# EAGLE board placa_v1 (EAGLE 7.2.0)
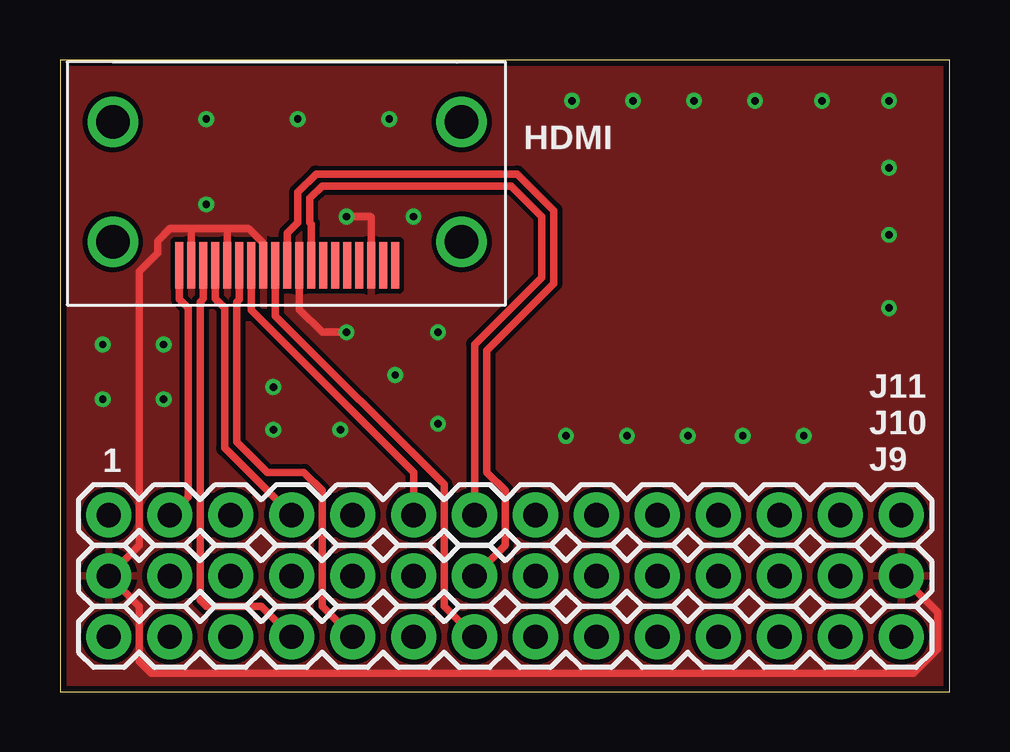
[diagram p0: board, top side]
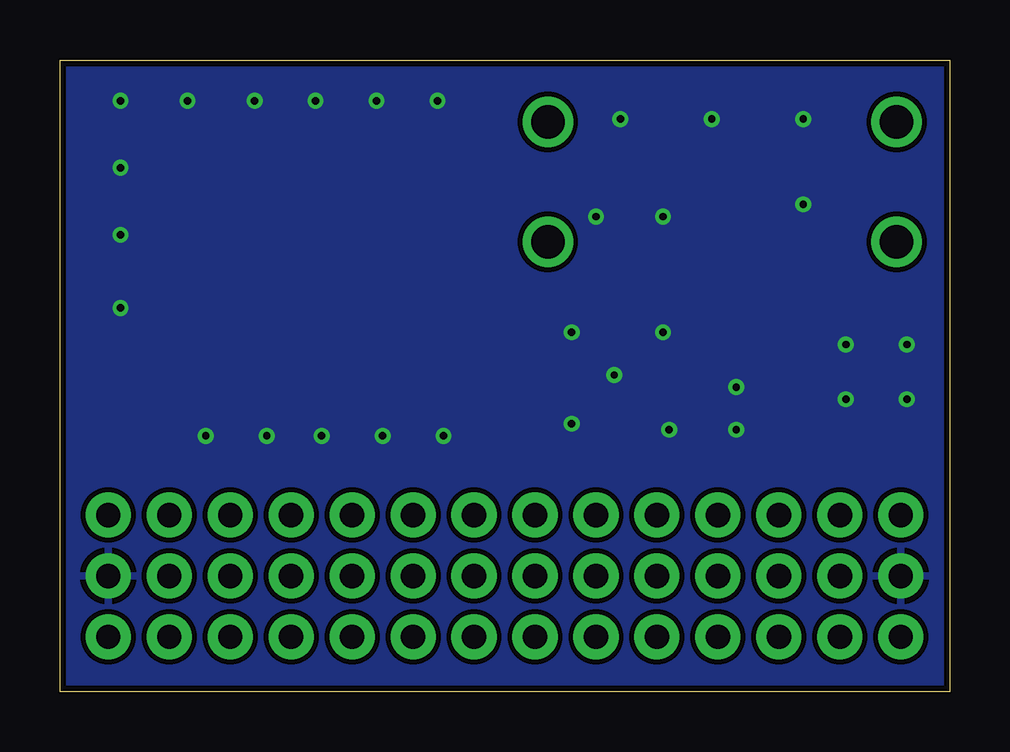
[diagram p1: board, bottom side, seen from below]

Size 37.06 x 26.34 mm. Coordinates in mm from the lower left corner, seen from the top.
Outline: 0,0 37.06,0 37.06,26.34 0,26.34 0,0
Copper layers (1*16): Top 0.035mm / dielectric 1.5mm / Bottom 0.035mm
Design rules "dirt_cheap_dirty_boards.v1": minimum track width 5mil, minimum drill 12mil, track to track 5mil, track to pad 5mil, pad to pad 5mil, via to via 5mil, smd to smd 0mil, copper to edge 10mil, drill to drill 10mil, minimum pad ring 10mil, minimum via ring 6mil, stop-mask expansion 2mil, vias tented up to drill 25mil, thermal gap 10mil
Net classes: 0 default: width 0.203 mm, clearance 0.203 mm; 1 power: width 0.406 mm, clearance 0.203 mm to class 0, clearance 0.203 mm

## Footprints (pad centres in the part's own frame; a part is rotated, then mirrored left to right if it is on the bottom)
1X14 = drill 1.016 pad 1.88: 1 0,0; 2 2.54,0; 3 5.08,0; 4 7.62,0; 5 10.16,0; 6 12.7,0; 7 15.24,0; 8 17.78,0; 9 20.32,0; 10 22.86,0; 11 25.4,0; 12 27.94,0; 13 30.48,0; 14 33.02,0
HDMI = smd 0.33 x 1.95: P$1 0,0; P$2 0.5,0; P$3 1,0; P$4 1.5,0; P$5 2,0; P$6 2.5,0; P$7 3,0; P$8 3.5,0; P$9 4,0; P$10 4.5,0; P$11 5,0; P$12 5.5,0; P$13 6,0; P$14 6.5,0; P$15 7,0; P$16 7.5,0; P$17 8,0; P$18 8.5,0; P$19 9,0 | drill 1.4: P$20 -2.765,-0.975; P$21 -2.765,-5.975; P$22 11.765,-5.975; P$23 11.765,-0.975

## Placement (x,y rotation side)
J9  M14  [1X14]  2.03,2.29 0 top
J10  M14  [1X14]  2.03,4.83 0 top
J11  M14  [1X14]  2.03,7.37 0 top
U$1  HDMI  [HDMI]  13.97,17.78 180 top

## Library data of the parts
J9-J11 = SparkFun
U$1 = 00_cody

## Nets
CLK_N: J11.7 U$1.P$8
CLK_P: J10.7 U$1.P$10
D0_N: J9.7 U$1.P$11
D0_P: J11.6 U$1.P$13
D1_N: J9.5 U$1.P$14
D1_P: J11.4 U$1.P$16
D2_N: J9.4 U$1.P$17
D2_P: J11.2 U$1.P$19
GND [power]: J10.1 J10.14 U$1.P$3 U$1.P$9 U$1.P$12 U$1.P$15 U$1.P$18

## Tracks (layer width: path | path; a pad name or v marks a point on that pad's centre or on a via)
CLK_N
  Top 0.305: U$1.P$8 10.47,19.5 10.41,19.56 10.41,20.57 10.92,21.08 18.8,21.08 20.07,19.81 20.07,17.27 17.27,14.48 J11.7
CLK_P
  Top 0.305: U$1.P$10 9.47,19.12 9.91,19.56 9.91,20.83 10.67,21.59 19.05,21.59 20.57,20.07 20.57,17.02 17.78,14.22 17.78,9.14 18.54,8.38 18.54,6.1 J10.7
D0_N
  Top 0.305: J9.7 16,3.56 16,8.64 8.97,15.67 U$1.P$11
D0_P
  Top 0.305: J11.6 14.73,9.14 7.97,15.91 U$1.P$13
D1_N
  Top 0.305: J9.5 10.92,3.56 10.92,8.38 10.16,9.14 8.64,9.14 7.37,10.41 7.37,16.26 7.47,16.36 U$1.P$14
D1_P
  Top 0.305: J11.4 6.86,10.16 6.86,16 6.47,16.39 U$1.P$16
D2_N
  Top 0.305: J9.4 8.38,3.56 6.1,3.56 5.84,3.81 5.84,16.26 5.97,16.38 U$1.P$17
D2_P
  Top 0.305: J11.2 5.33,8.13 5.33,16 4.97,16.37 U$1.P$19
GND  (via drill 0.3 pad 0.66)
  Top 0.305: 5.59,19.3 4.57,19.3 4.06,18.8 4.06,18.29 3.3,17.53 3.3,6.1 J10.1 3.3,3.56 3.3,1.27 3.81,0.76 35.56,0.76 36.58,1.78 36.58,3.3 J10.14 | 5.59,19.3 6.86,19.3 | 6.86,19.3 7.87,19.3 8.47,18.71 U$1.P$12 | U$1.P$15 6.97,19.19 6.86,19.3 | U$1.P$18 5.47,19.19 5.59,19.3 | U$1.P$3 12.97,19.8 12.95,19.81 v11.94,19.81 | U$1.P$9 9.97,15.94 10.92,14.99 v11.94,14.99
  other vias: 1.78,12.19 1.78,14.48 4.32,12.19 4.32,14.48 13.72,23.88 6.1,23.88 15.75,11.18 14.73,19.81 15.75,14.99 11.68,10.92 8.89,10.92 8.89,12.7 6.1,20.32 28.96,24.64 21.34,24.64 23.88,24.64 26.42,24.64 31.75,24.64 34.54,24.64 34.54,21.84 34.54,19.05 34.54,16 21.08,10.67 23.62,10.67 26.16,10.67 28.45,10.67 30.99,10.67 13.97,13.21 9.91,23.88
  pour Bottom: 0,26.42 37.08,26.42 37.08,0 0,0
  pour Top: 0,26.42 37.08,26.42 37.08,0 0,0

## Text on the board
tPlace: HDMI | 1